# EAGLE board Enclosure.Front.8Gpio (EAGLE 7.6.0)

Size 60 x 22.7 mm. Coordinates in mm from the lower left corner, seen from the top.
Outline: 0,0 60,0 60,22.7 0,22.7 0,0
Copper layers (1*16): Top 0.035mm / dielectric 1.5mm / Bottom 0.035mm
Design rules "default": minimum track width 10mil, minimum drill 24mil, track to track 8mil, track to pad 8mil, pad to pad 8mil, via to via 8mil, smd to smd 8mil, copper to edge 40mil, drill to drill 8mil, minimum pad ring 10mil, minimum via ring 8mil, stop-mask expansion 4mil, vias tented up to drill 0mil, thermal gap 10mil

## Footprints (pad centres in the part's own frame; a part is rotated, then mirrored left to right if it is on the bottom)
B3F-10XX = drill 1.016 long: 1 -3.251,2.261; 2 3.251,2.261; 3 -3.251,-2.261; 4 3.251,-2.261
1X10-BIG = drill 1.016 pad 1.778 octagon: 1 -11.43,0; 2 -8.89,0; 3 -6.35,0; 4 -3.81,0; 5 -1.27,0; 6 1.27,0; 7 3.81,0; 8 6.35,0; 9 8.89,0; 10 11.43,0
SO18W = smd 0.6 x 2.2: 1 -4.445,-4.6; 2 -3.175,-4.6; 3 -1.905,-4.6; 4 -0.635,-4.6; 5 0.635,-4.6; 6 1.905,-4.6; 7 3.175,-4.6; 8 4.445,-4.6; 9 5.715,-4.6; 10 5.775,4.6; 11 4.505,4.6; 12 3.235,4.6; 13 1.965,4.6; 14 0.695,4.6; 15 -0.575,4.6; 16 -1.845,4.6; 17 -3.145,4.6; 18 -4.445,4.6
1206 = smd 1.6 x 1.803: A -1.422,0; C 1.422,0
R1206 = smd 1.6 x 1.803: 1 -1.422,0; 2 1.422,0

## Placement (x,y rotation side)
A  [B3F-10XX]  7,11 270 top
B  [B3F-10XX]  54,11 270 top
GPIO_EX  PINHD-1X10  [1X10-BIG]  30,4 0 top
IC1  MCP23008/SO  [SO18W]  8,15.5 0 bottom
LED_X  [1206]  41,19.5 0 top
LED_Y  [1206]  19,19.5 180 top
NUSBIO_IN  PINHD-1X10  [1X10-BIG]  30,9.87 0 top
NUSBIO_OUTPUTS  PINHD-1X10  [1X10-BIG]  30,13.43 0 top
POWER  [1206]  55,18 0 top
R_A  [R1206]  14,6 0 bottom
R_B  [R1206]  47,2.5 180 bottom
R_PWR  [R1206]  48,18 0 bottom
R_X  [R1206]  35,18.5 0 bottom
R_Y  [R1206]  25,19.5 0 bottom

## Library data of the parts
A B = switch-omron; MPN: B3F-1000; OC_FARNELL: 176432; OC_NEWARK: 36M3542
GPIO_EX IC1 LED_X LED_Y NUSBIO_IN NUSBIO_OUTPUTS POWER R_A R_B R_PWR R_X R_Y = adafruit

## Nets
GND: GPIO_EX.10 IC1.3 IC1.4 IC1.5 IC1.9 NUSBIO_IN.10 NUSBIO_OUTPUTS.10 R_A.1 R_B.1 R_PWR.1 R_X.1 R_Y.1
GPIO_0: IC1.1 NUSBIO_IN.1 NUSBIO_OUTPUTS.1
GPIO_1: IC1.2 NUSBIO_IN.2 NUSBIO_OUTPUTS.2
GPIO_2: NUSBIO_IN.3 NUSBIO_OUTPUTS.3
GPIO_3: NUSBIO_IN.4 NUSBIO_OUTPUTS.4
GPIO_4: NUSBIO_IN.5 NUSBIO_OUTPUTS.5
GPIO_5: NUSBIO_IN.6 NUSBIO_OUTPUTS.6
GPIO_6: NUSBIO_IN.7 NUSBIO_OUTPUTS.7
GPIO_7: NUSBIO_IN.8 NUSBIO_OUTPUTS.8
GPIO_8: GPIO_EX.1 IC1.10 LED_X.A
GPIO_9: GPIO_EX.2 IC1.11 LED_Y.A
GPIO_10: B.1 GPIO_EX.3 IC1.12
GPIO_11: A.1 GPIO_EX.4 IC1.13
GPIO_12: GPIO_EX.5 IC1.14
GPIO_13: GPIO_EX.6 IC1.15
GPIO_14: GPIO_EX.7 IC1.16
GPIO_15: GPIO_EX.8 IC1.17
N$1: POWER.C R_PWR.2
N$2: A.4 R_A.2
N$3: B.4 R_B.2
N$4: LED_X.C R_X.2
N$5: LED_Y.C R_Y.2
VCC: GPIO_EX.9 IC1.6 IC1.18 NUSBIO_IN.9 NUSBIO_OUTPUTS.9 POWER.A

## Tracks (layer width: path | path; a pad name or v marks a point on that pad's centre or on a via)
GND  (11 unrouted)
GPIO_0  (2 unrouted)
GPIO_1  (2 unrouted)
GPIO_2  (1 unrouted)
GPIO_3  (1 unrouted)
GPIO_4  (1 unrouted)
GPIO_5  (1 unrouted)
GPIO_6  (1 unrouted)
GPIO_7  (1 unrouted)
GPIO_8  (2 unrouted)
GPIO_9  (2 unrouted)
GPIO_10  (2 unrouted)
GPIO_11  (2 unrouted)
GPIO_12  (1 unrouted)
GPIO_13  (1 unrouted)
GPIO_14  (1 unrouted)
GPIO_15  (1 unrouted)
N$1  (1 unrouted)
N$2  (1 unrouted)
N$3  (1 unrouted)
N$4  (1 unrouted)
N$5  (1 unrouted)
VCC  (5 unrouted)

## Text on the board
tNames: 0 | 1 | 2 | 3 | 4 | 5 | 6 | 7 | VCC | GND | 8 | 9 | 10 | 11 | 12 | 13 | 14 | 15 | VCC | GND
bNames: LED + is inside